# EAGLE board RN-52 Breakout-Panel-v10 (EAGLE 6.5.0), part 1 of 2
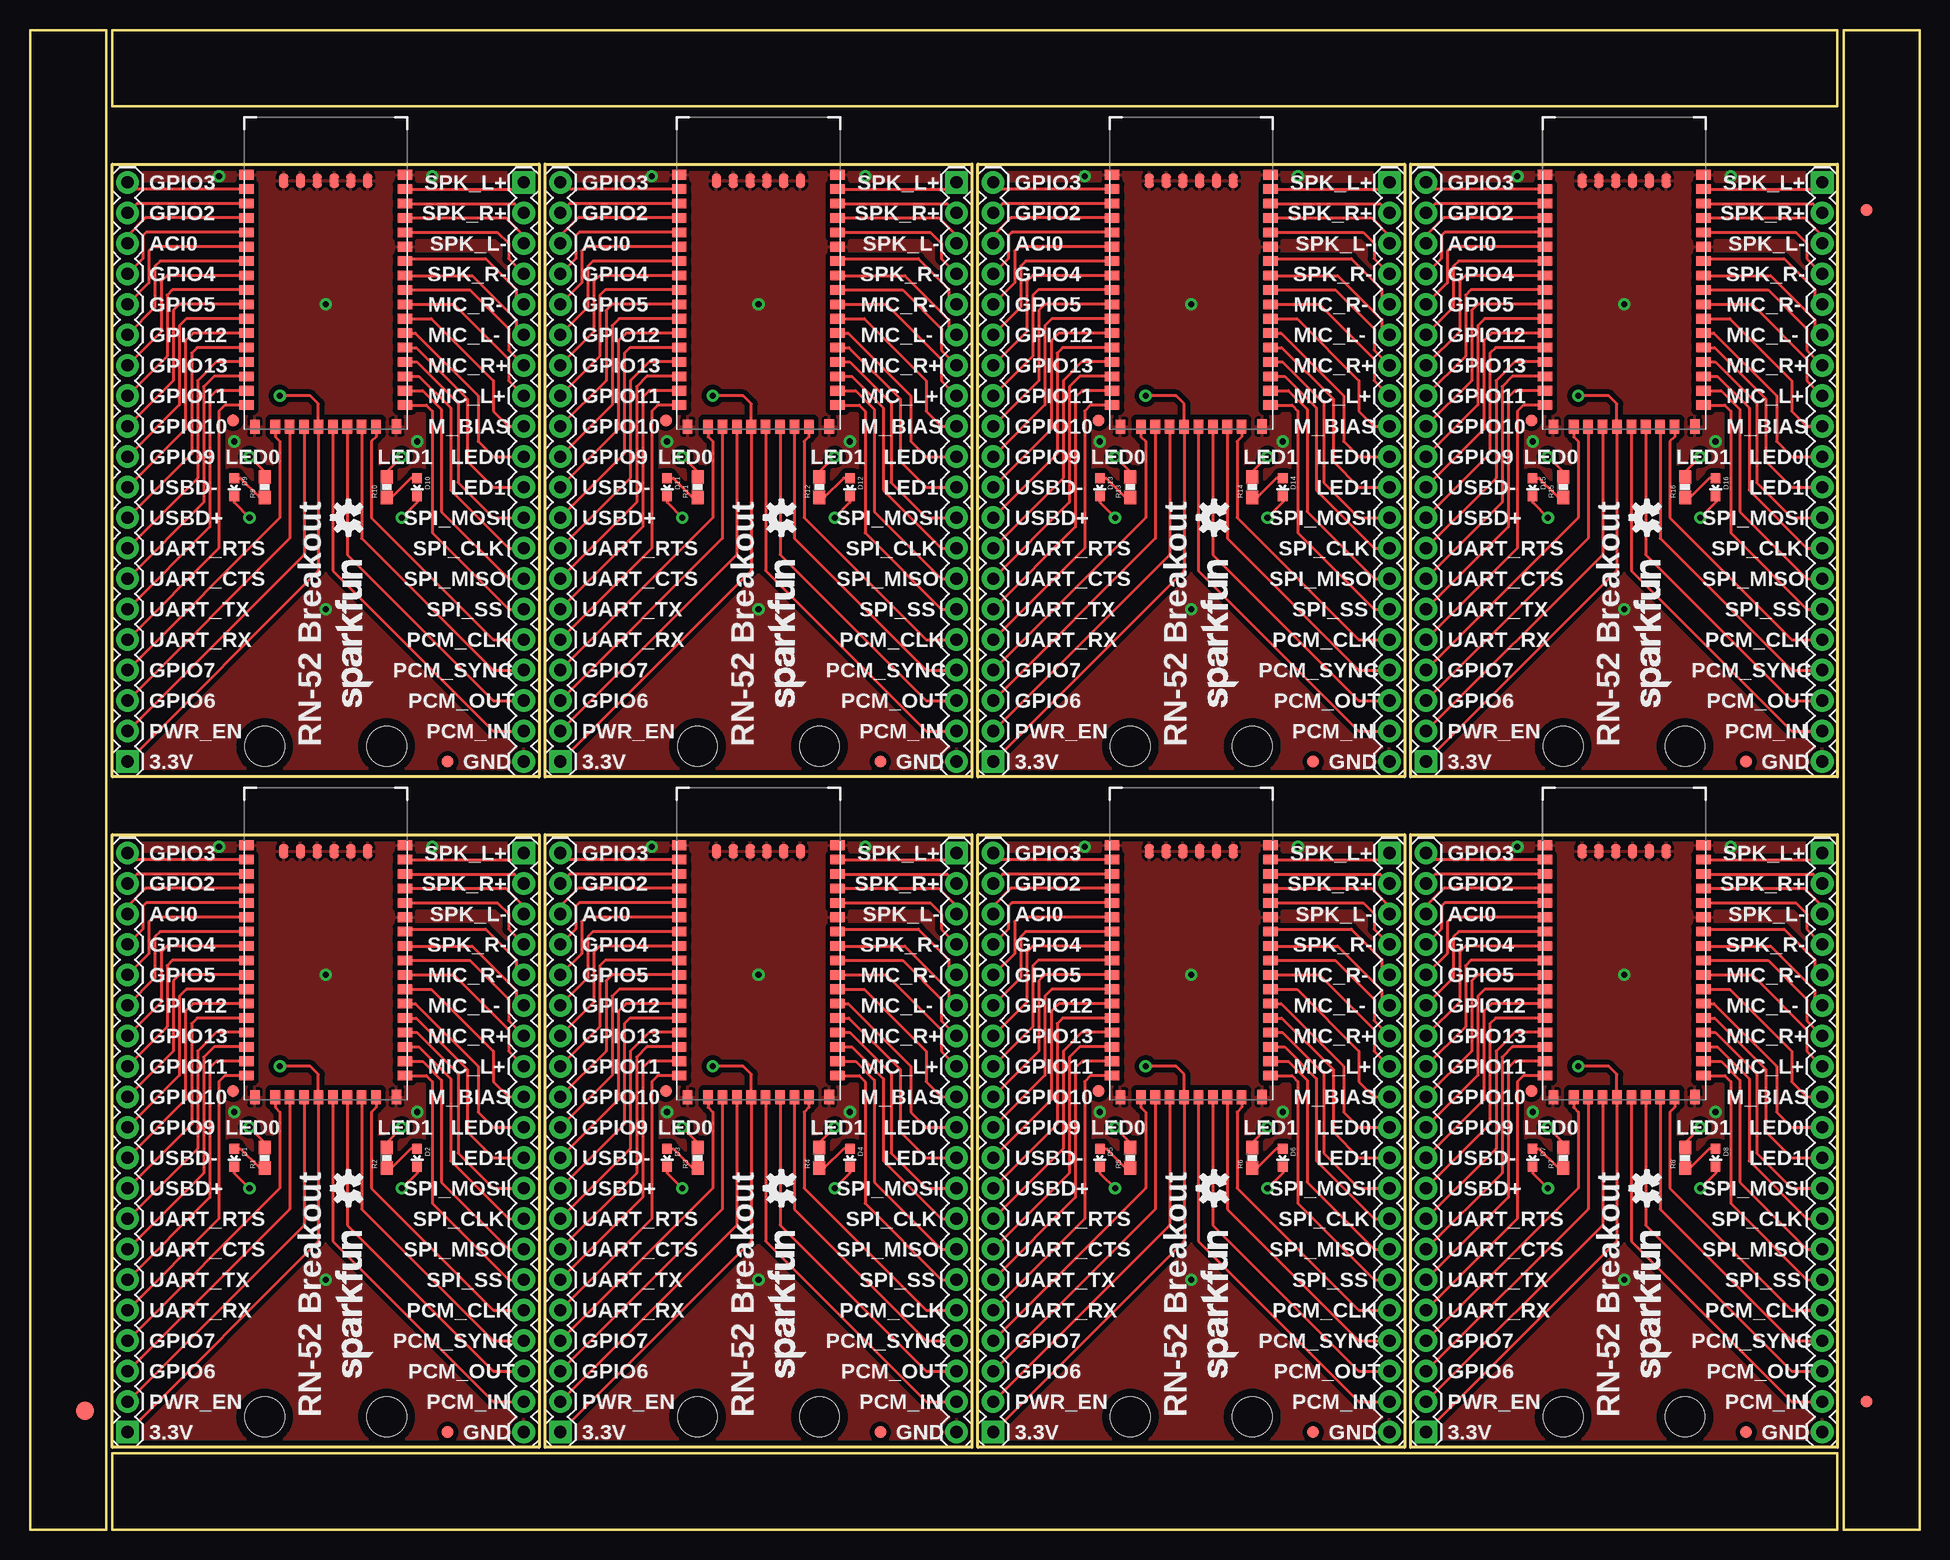
[diagram p0: board, top side]
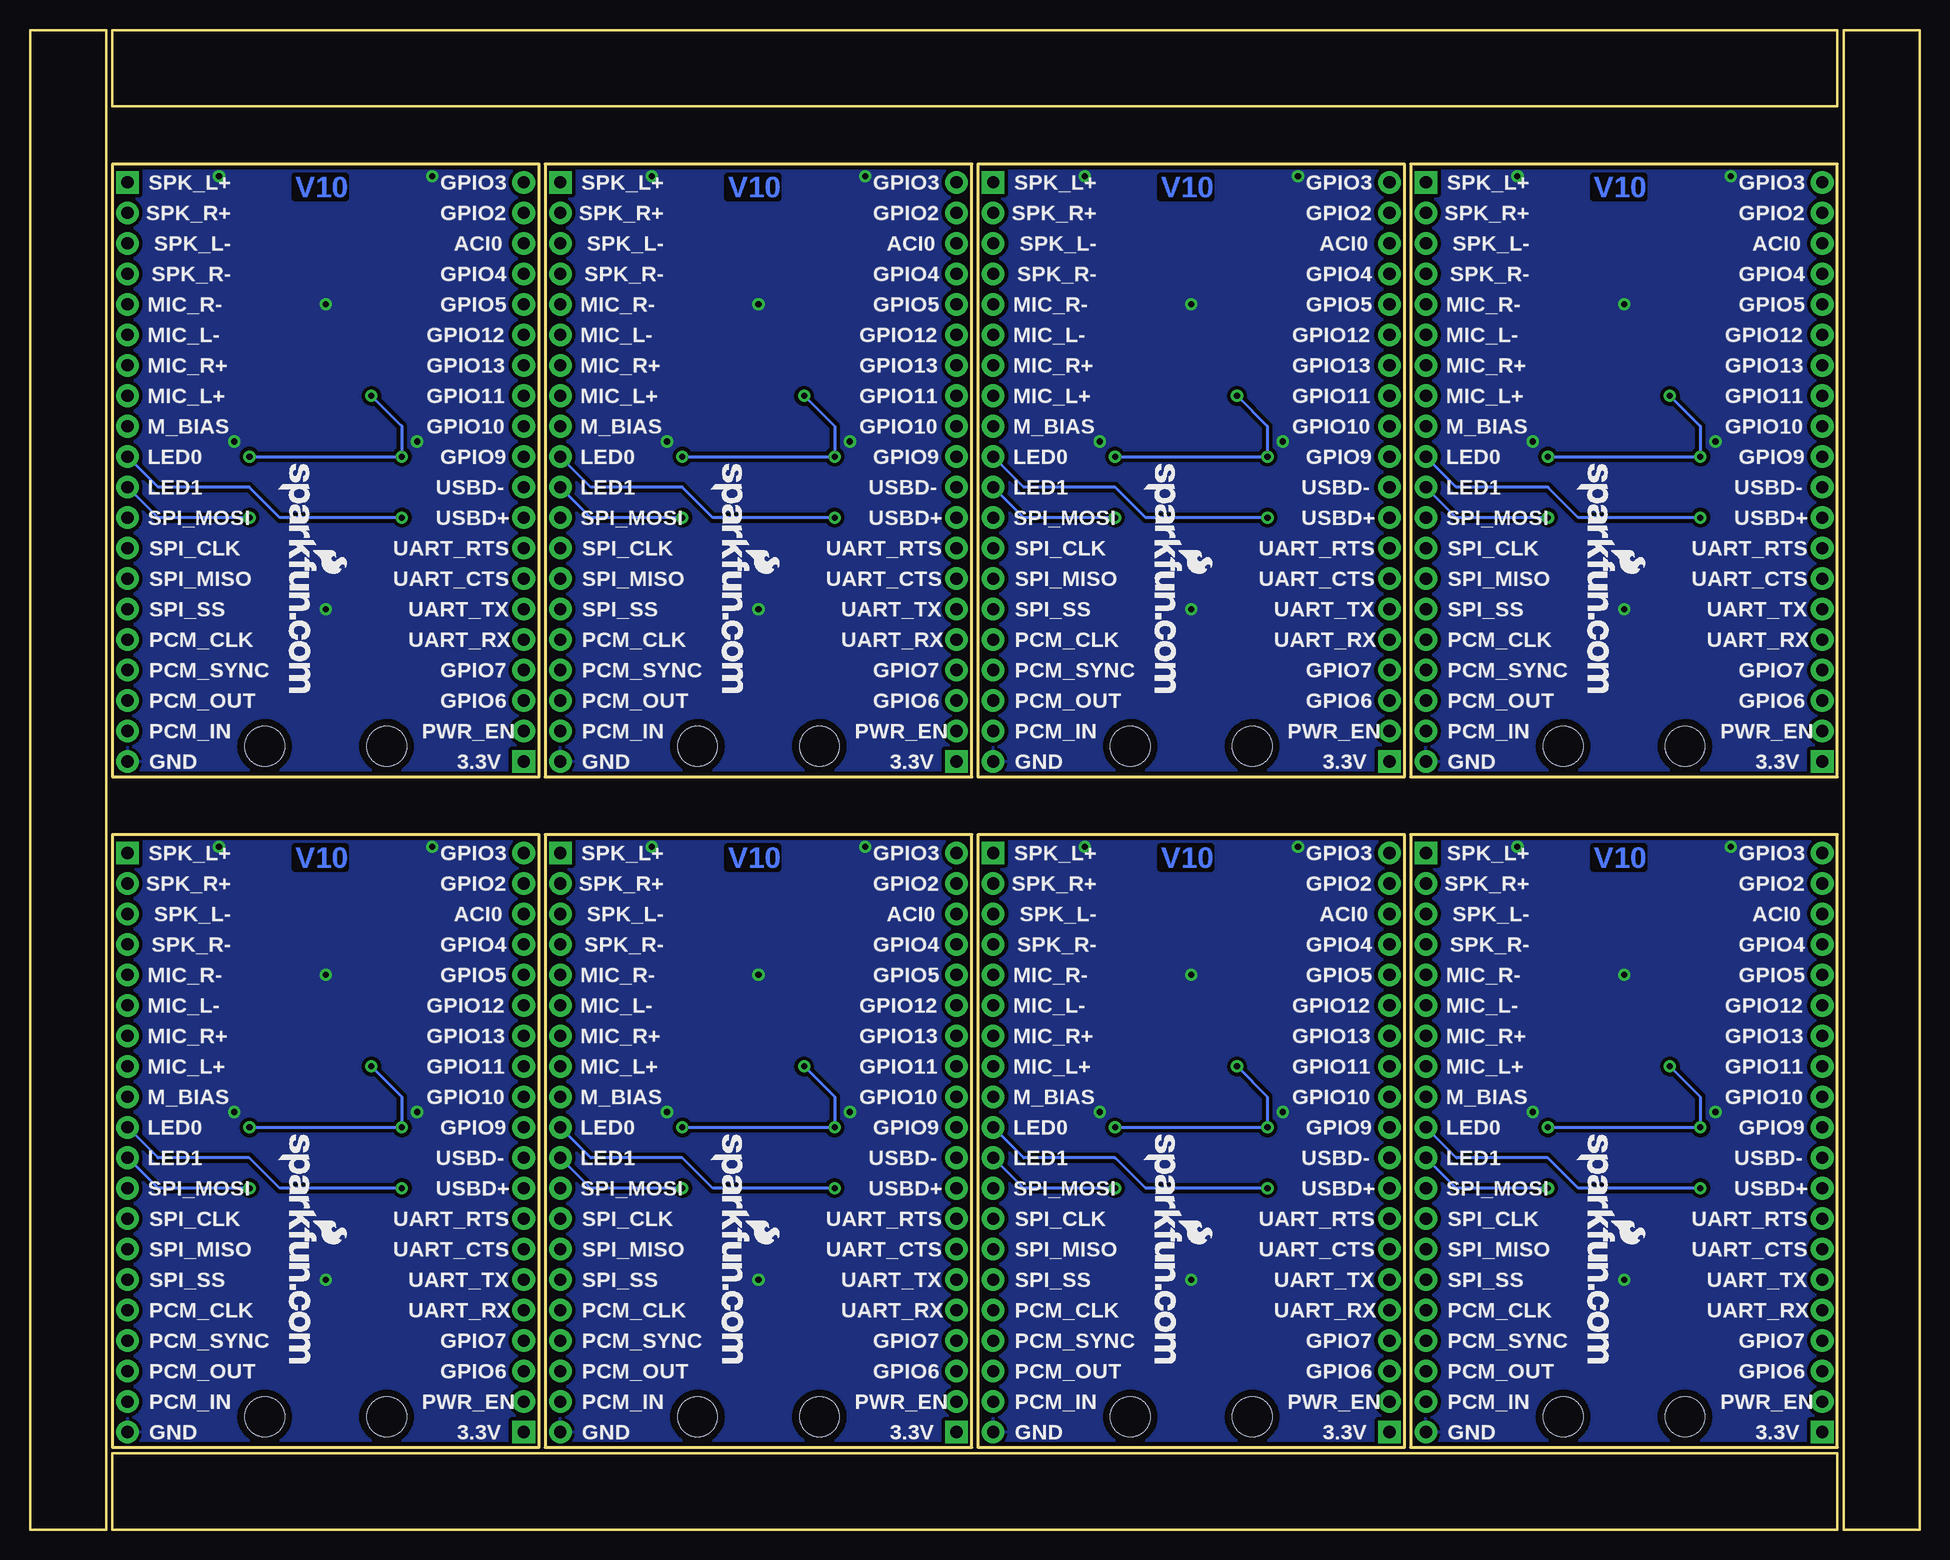
[diagram p1: board, bottom side, seen from below]

Size 157.48 x 124.97 mm. Coordinates in mm from the lower left corner, seen from the top.
Outline: 6.86,57.91 42.42,57.91 42.42,6.86 6.86,6.86 6.86,57.91
Outline: 42.93,57.91 78.49,57.91 78.49,6.86 42.93,6.86 42.93,57.91
Outline: 78.99,57.91 114.55,57.91 114.55,6.86 78.99,6.86 78.99,57.91
Outline: 115.06,57.91 150.62,57.91 150.62,6.86 115.06,6.86 115.06,57.91
Outline: 6.86,113.79 42.42,113.79 42.42,62.74 6.86,62.74 6.86,113.79
Outline: 42.93,113.79 78.49,113.79 78.49,62.74 42.93,62.74 42.93,113.79
Outline: 78.99,113.79 114.55,113.79 114.55,62.74 78.99,62.74 78.99,113.79
Outline: 115.06,113.79 150.62,113.79 150.62,62.74 115.06,62.74 115.06,113.79
Outline: 6.35,0 6.35,124.97 0,124.97 0,0 6.35,0
Outline: 6.86,6.35 6.86,0 150.62,0 150.62,6.35 6.86,6.35
Outline: 157.48,0 157.48,124.97 151.13,124.97 151.13,0 157.48,0
Outline: 150.62,118.62 150.62,124.97 6.86,124.97 6.86,118.62 150.62,118.62
Copper layers (1*16): Top 0.035mm / dielectric 1.5mm / Bottom 0.035mm
Design rules "default *": minimum track width 7mil, minimum drill 15mil, track to track 8mil, track to pad 8mil, pad to pad 8mil, via to via 8mil, smd to smd 8mil, copper to edge 8mil, drill to drill 8mil, minimum pad ring 12mil, minimum via ring 10mil, stop-mask expansion 4mil, vias tented up to drill 20mil, thermal gap 10mil

## Footprints (pad centres in the part's own frame; a part is rotated, then mirrored left to right if it is on the bottom)
LED-0603 = smd 0.8 x 0.8: A 0,-0.75; C 0,0.75
FIDUCIAL-1.5X3 = smd 1.5 x 1.5: 1 0,0
FIDUCIAL-1X2 = smd 1 x 1: 1 0,0
1X20 = drill 1.016 pad 1.88 square: 1 0,0 | drill 1.016 pad 1.88: 2 2.54,0; 3 5.08,0; 4 7.62,0; 5 10.16,0; 6 12.7,0; 7 15.24,0; 8 17.78,0; 9 20.32,0; 10 22.86,0; 11 25.4,0; 12 27.94,0; 13 30.48,0; 14 33.02,0; 15 35.56,0; 16 38.1,0; 17 40.64,0; 18 43.18,0; 19 45.72,0; 20 48.26,0
0603-RES = smd 1.1 x 1: 1 -0.85,0; 2 0.85,0
STAND-OFF = hole 3.302: 0,0
RN-52 = smd 1.2 x 0.8: 1 -6.6,8.33; 2 -6.6,7.13; 3 -6.6,5.93; 4 -6.6,4.73; 5 -6.6,3.53; 6 -6.6,2.33; 7 -6.6,1.13; 8 -6.6,-0.07; 9 -6.6,-1.27; 10 -6.6,-2.47; 11 -6.6,-3.67; 12 -6.6,-4.87; 13 -6.6,-6.07; 14 -6.6,-7.27; 15 -6.6,-8.47; 16 -6.6,-9.67; 25 6.6,-9.67; 26 6.6,-8.47; 27 6.6,-7.27; 28 6.6,-6.07; 29 6.6,-4.87; 30 6.6,-3.67; 31 6.6,-2.47; 32 6.6,-1.27; 33 6.6,-0.07; 34 6.6,1.13; 35 6.6,2.33; 36 6.6,3.53; 37 6.6,4.73; 38 6.6,5.93; 39 6.6,7.13; 40 6.6,8.33; G1 -6.6,9.53; G4 6.6,9.53 | smd 0.8 x 1.2: 17 -4.2,-11.47; 18 -3,-11.47; 19 -1.8,-11.47; 20 -0.6,-11.47; 21 0.6,-11.47; 22 1.8,-11.47; 23 3,-11.47; 24 4.2,-11.47; G2 -5.9,-11.47; G3 5.9,-11.46; RFG1 -3.5,9.03; RFG2 -2.1,9.03; RFG3 -0.7,9.03; RFG4 0.7,9.03; RFG5 2.1,9.03; RFG6 3.5,9.03

## Placement (x,y rotation side)
D1  GREEN  [LED-0603]  17.02,30.99 180 top
D2  RED  [LED-0603]  32.26,30.99 180 top
D3  GREEN  [LED-0603]  53.09,30.99 180 top
D4  RED  [LED-0603]  68.33,30.99 180 top
D5  GREEN  [LED-0603]  89.15,30.99 180 top
D6  RED  [LED-0603]  104.39,30.99 180 top
D7  GREEN  [LED-0603]  125.22,30.99 180 top
D8  RED  [LED-0603]  140.46,30.99 180 top
D9  GREEN  [LED-0603]  17.02,86.87 180 top
D10  RED  [LED-0603]  32.26,86.87 180 top
D11  GREEN  [LED-0603]  53.09,86.87 180 top
D12  RED  [LED-0603]  68.33,86.87 180 top
D13  GREEN  [LED-0603]  89.15,86.87 180 top
D14  RED  [LED-0603]  104.39,86.87 180 top
D15  GREEN  [LED-0603]  125.22,86.87 180 top
D16  RED  [LED-0603]  140.46,86.87 180 top
E$1  [FIDUCIAL-1.5X3]  4.57,9.91 0 top
E$4  [FIDUCIAL-1X2]  153.03,10.67 0 top
E$5  [FIDUCIAL-1X2]  153.03,109.98 180 top
FID1  FIDUCIAL1X2  [FIDUCIAL-1X2]  16.92,36.55 0 top
FID2  FIDUCIAL1X2  [FIDUCIAL-1X2]  34.8,8.13 0 top
FID3  FIDUCIAL1X2  [FIDUCIAL-1X2]  52.98,36.55 0 top
FID4  FIDUCIAL1X2  [FIDUCIAL-1X2]  70.87,8.13 0 top
FID5  FIDUCIAL1X2  [FIDUCIAL-1X2]  89.05,36.55 0 top
FID6  FIDUCIAL1X2  [FIDUCIAL-1X2]  106.93,8.13 0 top
FID7  FIDUCIAL1X2  [FIDUCIAL-1X2]  125.12,36.55 0 top
FID8  FIDUCIAL1X2  [FIDUCIAL-1X2]  143,8.13 0 top
FID9  FIDUCIAL1X2  [FIDUCIAL-1X2]  16.92,92.43 0 top
FID10  FIDUCIAL1X2  [FIDUCIAL-1X2]  34.8,64.01 0 top
FID11  FIDUCIAL1X2  [FIDUCIAL-1X2]  52.98,92.43 0 top
FID12  FIDUCIAL1X2  [FIDUCIAL-1X2]  70.87,64.01 0 top
FID13  FIDUCIAL1X2  [FIDUCIAL-1X2]  89.05,92.43 0 top
FID14  FIDUCIAL1X2  [FIDUCIAL-1X2]  106.93,64.01 0 top
FID15  FIDUCIAL1X2  [FIDUCIAL-1X2]  125.12,92.43 0 top
FID16  FIDUCIAL1X2  [FIDUCIAL-1X2]  143,64.01 0 top
JP1  M20  [1X20]  8.13,8.13 90 top
JP2  M20  [1X20]  41.15,56.39 270 top
JP3  M20  [1X20]  44.2,8.13 90 top
JP4  M20  [1X20]  77.22,56.39 270 top
JP5  M20  [1X20]  80.26,8.13 90 top
JP6  M20  [1X20]  113.28,56.39 270 top
JP7  M20  [1X20]  116.33,8.13 90 top
JP8  M20  [1X20]  149.35,56.39 270 top
JP9  M20  [1X20]  8.13,64.01 90 top
JP10  M20  [1X20]  41.15,112.27 270 top
JP11  M20  [1X20]  44.2,64.01 90 top
JP12  M20  [1X20]  77.22,112.27 270 top
JP13  M20  [1X20]  80.26,64.01 90 top
JP14  M20  [1X20]  113.28,112.27 270 top
JP15  M20  [1X20]  116.33,64.01 90 top
JP16  M20  [1X20]  149.35,112.27 270 top
LOGO1  OSHW-LOGOS  [OSHW-LOGO-S]  26.54,28.45 90 top
LOGO2  OSHW-LOGOS  [OSHW-LOGO-S]  62.61,28.45 90 top
LOGO3  LOGO-SFENEW  [SFE-NEW-WEBLOGO]  28.57,32.89 270 bottom
LOGO4  LOGO-SFENW2  [SFE-NEW-WEB]  28.57,12.7 90 top
LOGO5  LOGO-SFENEW  [SFE-NEW-WEBLOGO]  64.64,32.89 270 bottom
LOGO6  LOGO-SFENW2  [SFE-NEW-WEB]  64.64,12.7 90 top
LOGO7  OSHW-LOGOS  [OSHW-LOGO-S]  98.68,28.45 90 top
LOGO8  LOGO-SFENEW  [SFE-NEW-WEBLOGO]  100.71,32.89 270 bottom
LOGO9  LOGO-SFENW2  [SFE-NEW-WEB]  100.71,12.7 90 top
LOGO10  OSHW-LOGOS  [OSHW-LOGO-S]  134.75,28.45 90 top
LOGO11  LOGO-SFENEW  [SFE-NEW-WEBLOGO]  136.78,32.89 270 bottom
LOGO12  LOGO-SFENW2  [SFE-NEW-WEB]  136.78,12.7 90 top
LOGO13  OSHW-LOGOS  [OSHW-LOGO-S]  26.54,84.33 90 top
LOGO14  LOGO-SFENEW  [SFE-NEW-WEBLOGO]  28.57,88.77 270 bottom
LOGO15  LOGO-SFENW2  [SFE-NEW-WEB]  28.57,68.58 90 top
LOGO16  OSHW-LOGOS  [OSHW-LOGO-S]  62.61,84.33 90 top
LOGO17  LOGO-SFENEW  [SFE-NEW-WEBLOGO]  64.64,88.77 270 bottom
LOGO18  LOGO-SFENW2  [SFE-NEW-WEB]  64.64,68.58 90 top
LOGO19  OSHW-LOGOS  [OSHW-LOGO-S]  98.68,84.33 90 top
LOGO20  LOGO-SFENEW  [SFE-NEW-WEBLOGO]  100.71,88.77 270 bottom
LOGO21  LOGO-SFENW2  [SFE-NEW-WEB]  100.71,68.58 90 top
LOGO22  OSHW-LOGOS  [OSHW-LOGO-S]  134.75,84.33 90 top
LOGO23  LOGO-SFENEW  [SFE-NEW-WEBLOGO]  136.78,88.77 270 bottom
LOGO24  LOGO-SFENW2  [SFE-NEW-WEB]  136.78,68.58 90 top
R1  330  [0603-RES]  19.56,30.99 90 top
R2  330  [0603-RES]  29.72,30.99 90 top
R3  330  [0603-RES]  55.63,30.99 90 top
R4  330  [0603-RES]  65.79,30.99 90 top
R5  330  [0603-RES]  91.69,30.99 90 top
R6  330  [0603-RES]  101.85,30.99 90 top
R7  330  [0603-RES]  127.76,30.99 90 top
R8  330  [0603-RES]  137.92,30.99 90 top
R9  330  [0603-RES]  19.56,86.87 90 top
R10  330  [0603-RES]  29.72,86.87 90 top
R11  330  [0603-RES]  55.63,86.87 90 top
R12  330  [0603-RES]  65.79,86.87 90 top
R13  330  [0603-RES]  91.69,86.87 90 top
R14  330  [0603-RES]  101.85,86.87 90 top
R15  330  [0603-RES]  127.76,86.87 90 top
R16  330  [0603-RES]  137.92,86.87 90 top
STANDOFF1  STAND-OFF  [STAND-OFF]  19.56,9.4 0 top
STANDOFF2  STAND-OFF  [STAND-OFF]  29.72,9.4 0 top
STANDOFF3  STAND-OFF  [STAND-OFF]  55.63,9.4 0 top
STANDOFF4  STAND-OFF  [STAND-OFF]  65.79,9.4 0 top
STANDOFF5  STAND-OFF  [STAND-OFF]  91.69,9.4 0 top
STANDOFF6  STAND-OFF  [STAND-OFF]  101.85,9.4 0 top
STANDOFF7  STAND-OFF  [STAND-OFF]  127.76,9.4 0 top
STANDOFF8  STAND-OFF  [STAND-OFF]  137.92,9.4 0 top
STANDOFF9  STAND-OFF  [STAND-OFF]  19.56,65.28 0 top
STANDOFF10  STAND-OFF  [STAND-OFF]  29.72,65.28 0 top
STANDOFF11  STAND-OFF  [STAND-OFF]  55.63,65.28 0 top
STANDOFF12  STAND-OFF  [STAND-OFF]  65.79,65.28 0 top
STANDOFF13  STAND-OFF  [STAND-OFF]  91.69,65.28 0 top
STANDOFF14  STAND-OFF  [STAND-OFF]  101.85,65.28 0 top
STANDOFF15  STAND-OFF  [STAND-OFF]  127.76,65.28 0 top
STANDOFF16  STAND-OFF  [STAND-OFF]  137.92,65.28 0 top
U1  BLUETOOTH-RN-52  [RN-52]  24.64,47.5 0 top
U2  BLUETOOTH-RN-52  [RN-52]  60.71,47.5 0 top
U3  BLUETOOTH-RN-52  [RN-52]  96.77,47.5 0 top
U4  BLUETOOTH-RN-52  [RN-52]  132.84,47.5 0 top
U5  BLUETOOTH-RN-52  [RN-52]  24.64,103.38 0 top
U6  BLUETOOTH-RN-52  [RN-52]  60.71,103.38 0 top
U7  BLUETOOTH-RN-52  [RN-52]  96.77,103.38 0 top
U8  BLUETOOTH-RN-52  [RN-52]  132.84,103.38 0 top

## Library data of the parts
D1 D3 D5 D7 D9 D11 D13 D15 = SparkFun-LED; PROD_ID: DIO-00821
D2 D4 D6 D8 D10 D12 D14 D16 = SparkFun-LED; PROD_ID: DIO-00819
E$1 = SparkFun-Retired
E$4 E$5 FID1-FID16 LOGO1-LOGO24 = SparkFun-Aesthetics
JP1-JP16 = SparkFun-Connectors
R1-R16 = SparkFun-Resistors
STANDOFF1-STANDOFF16 = SparkFun-Electromechanical
U1-U8 = SparkFun-RF

## Nets
3.3V: JP1.1 R1.2 R2.2 U1.20
3.3V1: JP3.1 R3.2 R4.2 U2.20
3.3V2: JP5.1 R5.2 R6.2 U3.20
3.3V3: JP7.1 R7.2 R8.2 U4.20
3.3V4: JP9.1 R9.2 R10.2 U5.20
3.3V5: JP11.1 R11.2 R12.2 U6.20
3.3V6: JP13.1 R13.2 R14.2 U7.20
3.3V7: JP15.1 R15.2 R16.2 U8.20
AIC0: JP1.18 U1.3
AIC1: JP3.18 U2.3
AIC2: JP5.18 U3.3
AIC3: JP7.18 U4.3
AIC4: JP9.18 U5.3
AIC5: JP11.18 U6.3
AIC6: JP13.18 U7.3
AIC7: JP15.18 U8.3
GND: JP2.20 U1.36 U1.G1 U1.G2 U1.G3 U1.G4 U1.RFG1 U1.RFG2 U1.RFG3 U1.RFG4 U1.RFG5 U1.RFG6
GND1: JP4.20 U2.36 U2.G1 U2.G2 U2.G3 U2.G4 U2.RFG1 U2.RFG2 U2.RFG3 U2.RFG4 U2.RFG5 U2.RFG6
GND2: JP6.20 U3.36 U3.G1 U3.G2 U3.G3 U3.G4 U3.RFG1 U3.RFG2 U3.RFG3 U3.RFG4 U3.RFG5 U3.RFG6
GND3: JP8.20 U4.36 U4.G1 U4.G2 U4.G3 U4.G4 U4.RFG1 U4.RFG2 U4.RFG3 U4.RFG4 U4.RFG5 U4.RFG6
GND4: JP10.20 U5.36 U5.G1 U5.G2 U5.G3 U5.G4 U5.RFG1 U5.RFG2 U5.RFG3 U5.RFG4 U5.RFG5 U5.RFG6
GND5: JP12.20 U6.36 U6.G1 U6.G2 U6.G3 U6.G4 U6.RFG1 U6.RFG2 U6.RFG3 U6.RFG4 U6.RFG5 U6.RFG6
GND6: JP14.20 U7.36 U7.G1 U7.G2 U7.G3 U7.G4 U7.RFG1 U7.RFG2 U7.RFG3 U7.RFG4 U7.RFG5 U7.RFG6
GND7: JP16.20 U8.36 U8.G1 U8.G2 U8.G3 U8.G4 U8.RFG1 U8.RFG2 U8.RFG3 U8.RFG4 U8.RFG5 U8.RFG6
GPIO1: JP3.20 U2.1
GPIO2: JP1.19 U1.2
GPIO3: JP1.20 U1.1
GPIO4: JP1.17 U1.4
GPIO5: JP1.16 U1.5
GPIO6: JP1.3 U1.18
GPIO7: JP1.4 U1.17
GPIO8: JP3.19 U2.2
GPIO9: JP1.11 U1.10
GPIO10: JP1.12 U1.9
GPIO11: JP1.13 U1.8
GPIO12: JP1.15 U1.6
GPIO13: JP1.14 U1.7
GPIO14: JP3.17 U2.4
GPIO15: JP3.16 U2.5
GPIO16: JP3.15 U2.6
GPIO17: JP3.14 U2.7
GPIO18: JP3.13 U2.8
GPIO19: JP3.12 U2.9
GPIO20: JP3.11 U2.10
GPIO21: JP3.4 U2.17
GPIO22: JP3.3 U2.18
GPIO23: JP5.20 U3.1
GPIO24: JP5.19 U3.2
GPIO25: JP5.17 U3.4
GPIO26: JP5.16 U3.5
GPIO27: JP5.15 U3.6
GPIO28: JP5.14 U3.7
GPIO29: JP5.13 U3.8
GPIO30: JP5.12 U3.9
GPIO31: JP5.11 U3.10
GPIO32: JP5.4 U3.17
GPIO33: JP5.3 U3.18
GPIO34: JP7.20 U4.1
GPIO35: JP7.19 U4.2
GPIO36: JP7.17 U4.4
GPIO37: JP7.16 U4.5
GPIO38: JP7.15 U4.6
GPIO39: JP7.14 U4.7
GPIO40: JP7.13 U4.8
GPIO41: JP7.12 U4.9
GPIO42: JP7.11 U4.10
GPIO43: JP7.4 U4.17
GPIO44: JP7.3 U4.18
GPIO45: JP9.20 U5.1
GPIO46: JP9.19 U5.2
GPIO47: JP9.17 U5.4
GPIO48: JP9.16 U5.5
GPIO49: JP9.15 U5.6
GPIO50: JP9.14 U5.7
GPIO51: JP9.13 U5.8
GPIO52: JP9.12 U5.9
GPIO53: JP9.11 U5.10
GPIO54: JP9.4 U5.17
GPIO55: JP9.3 U5.18
GPIO56: JP11.20 U6.1
GPIO57: JP11.19 U6.2
GPIO58: JP11.17 U6.4
GPIO59: JP11.16 U6.5
GPIO60: JP11.15 U6.6
GPIO61: JP11.14 U6.7
GPIO62: JP11.13 U6.8
GPIO63: JP11.12 U6.9
GPIO64: JP11.11 U6.10
GPIO65: JP11.4 U6.17
GPIO66: JP11.3 U6.18
GPIO67: JP13.20 U7.1
GPIO68: JP13.19 U7.2
GPIO69: JP13.17 U7.4
GPIO70: JP13.16 U7.5
GPIO71: JP13.15 U7.6
GPIO72: JP13.14 U7.7
GPIO73: JP13.13 U7.8
GPIO74: JP13.12 U7.9
GPIO75: JP13.11 U7.10
GPIO76: JP13.4 U7.17
GPIO77: JP13.3 U7.18
GPIO78: JP15.20 U8.1
GPIO79: JP15.19 U8.2
GPIO80: JP15.17 U8.4
GPIO81: JP15.16 U8.5
GPIO82: JP15.15 U8.6
GPIO83: JP15.14 U8.7
GPIO84: JP15.13 U8.8
GPIO85: JP15.12 U8.9
GPIO86: JP15.11 U8.10
GPIO87: JP15.4 U8.17
GPIO88: JP15.3 U8.18
LED0: D1.C JP2.10 U1.30
LED1: D2.C JP2.11 U1.29
LED2: D3.C JP4.10 U2.30
LED3: D4.C JP4.11 U2.29
LED4: D5.C JP6.10 U3.30
LED5: D6.C JP6.11 U3.29
LED6: D7.C JP8.10 U4.30
LED7: D8.C JP8.11 U4.29
LED8: D9.C JP10.10 U5.30
LED9: D10.C JP10.11 U5.29
LED10: D11.C JP12.10 U6.30
LED11: D12.C JP12.11 U6.29
LED12: D13.C JP14.10 U7.30
LED13: D14.C JP14.11 U7.29
LED14: D15.C JP16.10 U8.30
LED15: D16.C JP16.11 U8.29
MIC_BIAS: JP2.9 U1.31
MIC_BIAS1: JP4.9 U2.31
MIC_BIAS2: JP6.9 U3.31
MIC_BIAS3: JP8.9 U4.31
MIC_BIAS4: JP10.9 U5.31
MIC_BIAS5: JP12.9 U6.31
MIC_BIAS6: JP14.9 U7.31
MIC_BIAS7: JP16.9 U8.31
MIC_L+: JP2.8 U1.32
MIC_L+1: JP4.8 U2.32
MIC_L+2: JP6.8 U3.32
MIC_L+3: JP8.8 U4.32
MIC_L+4: JP10.8 U5.32
MIC_L+5: JP12.8 U6.32
MIC_L+6: JP14.8 U7.32
MIC_L+7: JP16.8 U8.32
MIC_L-: JP2.6 U1.34
MIC_L-1: JP4.6 U2.34
MIC_L-2: JP6.6 U3.34
MIC_L-3: JP8.6 U4.34
MIC_L-4: JP10.6 U5.34
MIC_L-5: JP12.6 U6.34
MIC_L-6: JP14.6 U7.34
MIC_L-7: JP16.6 U8.34
MIC_R+: JP2.7 U1.33
MIC_R+1: JP4.7 U2.33
MIC_R+2: JP6.7 U3.33
MIC_R+3: JP8.7 U4.33
MIC_R+4: JP10.7 U5.33
MIC_R+5: JP12.7 U6.33
MIC_R+6: JP14.7 U7.33
MIC_R+7: JP16.7 U8.33
MIC_R-: JP2.5 U1.35
MIC_R-1: JP4.5 U2.35
MIC_R-2: JP6.5 U3.35
MIC_R-3: JP8.5 U4.35
MIC_R-4: JP10.5 U5.35
MIC_R-5: JP12.5 U6.35
MIC_R-6: JP14.5 U7.35
MIC_R-7: JP16.5 U8.35
N$1: D2.A R2.1
N$2: D1.A R1.1
N$3: D4.A R4.1
N$4: D3.A R3.1
N$5: D6.A R6.1
N$6: D5.A R5.1
N$7: D8.A R8.1
N$8: D7.A R7.1
N$9: D10.A R10.1
N$10: D9.A R9.1
N$11: D12.A R12.1
N$12: D11.A R11.1
N$13: D14.A R14.1
N$14: D13.A R13.1
N$15: D16.A R16.1
N$16: D15.A R15.1
PCM_CLK: JP2.16 U1.24
PCM_CLK1: JP4.16 U2.24
PCM_CLK2: JP6.16 U3.24
PCM_CLK3: JP8.16 U4.24
PCM_CLK4: JP10.16 U5.24
PCM_CLK5: JP12.16 U6.24
PCM_CLK6: JP14.16 U7.24
PCM_CLK7: JP16.16 U8.24
PCM_IN: JP2.19 U1.21
PCM_IN1: JP4.19 U2.21
PCM_IN2: JP6.19 U3.21
PCM_IN3: JP8.19 U4.21
PCM_IN4: JP10.19 U5.21
PCM_IN5: JP12.19 U6.21
PCM_IN6: JP14.19 U7.21
PCM_IN7: JP16.19 U8.21
PCM_OUT: JP2.18 U1.22
PCM_OUT1: JP4.18 U2.22
PCM_OUT2: JP6.18 U3.22
PCM_OUT3: JP8.18 U4.22
PCM_OUT4: JP10.18 U5.22
PCM_OUT5: JP12.18 U6.22
PCM_OUT6: JP14.18 U7.22
PCM_OUT7: JP16.18 U8.22
PCM_SYNC: JP2.17 U1.23
PCM_SYNC1: JP4.17 U2.23
PCM_SYNC2: JP6.17 U3.23
PCM_SYNC3: JP8.17 U4.23
PCM_SYNC4: JP10.17 U5.23
PCM_SYNC5: JP12.17 U6.23
PCM_SYNC6: JP14.17 U7.23
PCM_SYNC7: JP16.17 U8.23
PWREN: JP1.2 U1.19
PWREN1: JP3.2 U2.19
PWREN2: JP5.2 U3.19
PWREN3: JP7.2 U4.19
PWREN4: JP9.2 U5.19
PWREN5: JP11.2 U6.19
PWREN6: JP13.2 U7.19
PWREN7: JP15.2 U8.19
SPI_CLK: JP2.13 U1.27
SPI_CLK1: JP4.13 U2.27
SPI_CLK2: JP6.13 U3.27
SPI_CLK3: JP8.13 U4.27
SPI_CLK4: JP10.13 U5.27
SPI_CLK5: JP12.13 U6.27
SPI_CLK6: JP14.13 U7.27
SPI_CLK7: JP16.13 U8.27
SPI_MISO: JP2.14 U1.26
SPI_MISO1: JP4.14 U2.26
SPI_MISO2: JP6.14 U3.26
SPI_MISO3: JP8.14 U4.26
SPI_MISO4: JP10.14 U5.26
SPI_MISO5: JP12.14 U6.26
SPI_MISO6: JP14.14 U7.26
SPI_MISO7: JP16.14 U8.26
SPI_MOSI: JP2.12 U1.28
SPI_MOSI1: JP4.12 U2.28
SPI_MOSI2: JP6.12 U3.28
SPI_MOSI3: JP8.12 U4.28
SPI_MOSI4: JP10.12 U5.28
SPI_MOSI5: JP12.12 U6.28
SPI_MOSI6: JP14.12 U7.28
SPI_MOSI7: JP16.12 U8.28
SPI_SS: JP2.15 U1.25
SPI_SS1: JP4.15 U2.25
SPI_SS2: JP6.15 U3.25
SPI_SS3: JP8.15 U4.25
SPI_SS4: JP10.15 U5.25
SPI_SS5: JP12.15 U6.25
SPI_SS6: JP14.15 U7.25
SPI_SS7: JP16.15 U8.25
SPKR_L+: JP2.1 U1.40
SPKR_L+1: JP4.1 U2.40
SPKR_L+2: JP6.1 U3.40
SPKR_L+3: JP8.1 U4.40
SPKR_L+4: JP10.1 U5.40
SPKR_L+5: JP12.1 U6.40
SPKR_L+6: JP14.1 U7.40
SPKR_L+7: JP16.1 U8.40
SPKR_L-: JP2.3 U1.38
SPKR_L-1: JP4.3 U2.38
SPKR_L-2: JP6.3 U3.38
SPKR_L-3: JP8.3 U4.38
SPKR_L-4: JP10.3 U5.38
SPKR_L-5: JP12.3 U6.38
SPKR_L-6: JP14.3 U7.38
SPKR_L-7: JP16.3 U8.38
SPKR_R+: JP2.2 U1.39
SPKR_R+1: JP4.2 U2.39
SPKR_R+2: JP6.2 U3.39
SPKR_R+3: JP8.2 U4.39
SPKR_R+4: JP10.2 U5.39
SPKR_R+5: JP12.2 U6.39
SPKR_R+6: JP14.2 U7.39
SPKR_R+7: JP16.2 U8.39
SPKR_R-: JP2.4 U1.37
SPKR_R-1: JP4.4 U2.37
SPKR_R-2: JP6.4 U3.37
SPKR_R-3: JP8.4 U4.37
SPKR_R-4: JP10.4 U5.37
SPKR_R-5: JP12.4 U6.37
SPKR_R-6: JP14.4 U7.37
SPKR_R-7: JP16.4 U8.37
UART_CTS: JP1.7 U1.14
UART_CTS1: JP3.7 U2.14
UART_CTS2: JP5.7 U3.14
UART_CTS3: JP7.7 U4.14
UART_CTS4: JP9.7 U5.14
UART_CTS5: JP11.7 U6.14
UART_CTS6: JP13.7 U7.14
UART_CTS7: JP15.7 U8.14
UART_RTS: JP1.8 U1.13
UART_RTS1: JP3.8 U2.13
UART_RTS2: JP5.8 U3.13
UART_RTS3: JP7.8 U4.13
UART_RTS4: JP9.8 U5.13
UART_RTS5: JP11.8 U6.13
UART_RTS6: JP13.8 U7.13
UART_RTS7: JP15.8 U8.13
UART_RX: JP1.5 U1.16
UART_RX1: JP3.5 U2.16
UART_RX2: JP5.5 U3.16
UART_RX3: JP7.5 U4.16
UART_RX4: JP9.5 U5.16
UART_RX5: JP11.5 U6.16
UART_RX6: JP13.5 U7.16
UART_RX7: JP15.5 U8.16
UART_TX: JP1.6 U1.15
UART_TX1: JP3.6 U2.15
UART_TX2: JP5.6 U3.15
UART_TX3: JP7.6 U4.15
UART_TX4: JP9.6 U5.15
UART_TX5: JP11.6 U6.15
UART_TX6: JP13.6 U7.15
UART_TX7: JP15.6 U8.15
USBD+: JP1.9 U1.12
USBD+1: JP3.9 U2.12
USBD+2: JP5.9 U3.12
USBD+3: JP7.9 U4.12
USBD+4: JP9.9 U5.12
USBD+5: JP11.9 U6.12
USBD+6: JP13.9 U7.12
USBD+7: JP15.9 U8.12
USBD-: JP1.10 U1.11
USBD-1: JP3.10 U2.11
USBD-2: JP5.10 U3.11
USBD-3: JP7.10 U4.11
USBD-4: JP9.10 U5.11
USBD-5: JP11.10 U6.11
USBD-6: JP13.10 U7.11
USBD-7: JP15.10 U8.11

## Tracks (layer width: path | path; a pad name or v marks a point on that pad's centre or on a via)
3.3V  (via drill 0.51)
  Top 0.254: JP1.1 24.04,24.04 U1.20 24.04,37.94 23.37,38.61 v20.83,38.61 | R2.2 29.72,32.26 v30.99,33.53 | R1.2 19.56,32.26 v18.29,33.53
  Bottom 0.254: v30.99,33.53 v18.29,33.53 18.29,36.07 v20.83,38.61
3.3V1  (via drill 0.51)
  Top 0.254: JP3.1 60.11,24.04 U2.20 60.11,37.94 59.44,38.61 v56.9,38.61 | R4.2 65.79,32.26 v67.06,33.53 | R3.2 55.63,32.26 v54.36,33.53
  Bottom 0.254: v67.06,33.53 v54.36,33.53 54.36,36.07 v56.9,38.61
3.3V2  (via drill 0.51)
  Top 0.254: JP5.1 96.17,24.04 U3.20 96.17,37.94 95.5,38.61 v92.96,38.61 | R6.2 101.85,32.26 v103.12,33.53 | R5.2 91.69,32.26 v90.42,33.53
  Bottom 0.254: v103.12,33.53 v90.42,33.53 90.42,36.07 v92.96,38.61
3.3V3  (via drill 0.51)
  Top 0.254: JP7.1 132.24,24.04 U4.20 132.24,37.94 131.57,38.61 v129.03,38.61 | R8.2 137.92,32.26 v139.19,33.53 | R7.2 127.76,32.26 v126.49,33.53
  Bottom 0.254: v139.19,33.53 v126.49,33.53 126.49,36.07 v129.03,38.61
3.3V4  (via drill 0.51)
  Top 0.254: JP9.1 24.04,79.92 U5.20 24.04,93.82 23.37,94.49 v20.83,94.49 | R10.2 29.72,88.14 v30.99,89.41 | R9.2 19.56,88.14 v18.29,89.41
  Bottom 0.254: v30.99,89.41 v18.29,89.41 18.29,91.95 v20.83,94.49
3.3V5  (via drill 0.51)
  Top 0.254: JP11.1 60.11,79.92 U6.20 60.11,93.82 59.44,94.49 v56.9,94.49 | R12.2 65.79,88.14 v67.06,89.41 | R11.2 55.63,88.14 v54.36,89.41
  Bottom 0.254: v67.06,89.41 v54.36,89.41 54.36,91.95 v56.9,94.49
3.3V6  (via drill 0.51)
  Top 0.254: JP13.1 96.17,79.92 U7.20 96.17,93.82 95.5,94.49 v92.96,94.49 | R14.2 101.85,88.14 v103.12,89.41 | R13.2 91.69,88.14 v90.42,89.41
  Bottom 0.254: v103.12,89.41 v90.42,89.41 90.42,91.95 v92.96,94.49
3.3V7  (via drill 0.51)
  Top 0.254: JP15.1 132.24,79.92 U8.20 132.24,93.82 131.57,94.49 v129.03,94.49 | R16.2 137.92,88.14 v139.19,89.41 | R15.2 127.76,88.14 v126.49,89.41
  Bottom 0.254: v139.19,89.41 v126.49,89.41 126.49,91.95 v129.03,94.49
AIC0
  Top 0.254: U1.3 9.61,53.43 8.13,51.94 JP1.18
AIC1
  Top 0.254: U2.3 45.68,53.43 44.2,51.94 JP3.18
AIC2
  Top 0.254: U3.3 81.75,53.43 80.26,51.94 JP5.18
AIC3
  Top 0.254: U4.3 117.82,53.43 116.33,51.94 JP7.18
AIC4
  Top 0.254: U5.3 9.61,109.31 8.13,107.82 JP9.18
AIC5
  Top 0.254: U6.3 45.68,109.31 44.2,107.82 JP11.18
AIC6
  Top 0.254: U7.3 81.75,109.31 80.26,107.82 JP13.18
AIC7
  Top 0.254: U8.3 117.82,109.31 116.33,107.82 JP15.18
GND  (via drill 0.51)
  other vias: 24.64,46.23 24.64,20.83 17.02,34.8 32.26,34.8 33.53,56.9 15.75,56.9
  pour Bottom (isolate 0.305): 6.86,57.66 42.42,57.66 42.42,6.86 6.86,6.86
  pour Top (isolate 0.406): 6.86,57.66 42.42,57.66 42.42,6.86 6.86,6.86
GND1  (via drill 0.51)
  other vias: 60.71,46.23 60.71,20.83 53.09,34.8 68.33,34.8 69.6,56.9 51.82,56.9
  pour Bottom (isolate 0.305): 42.93,57.66 78.49,57.66 78.49,6.86 42.93,6.86
  pour Top (isolate 0.406): 42.93,57.66 78.49,57.66 78.49,6.86 42.93,6.86
GND2  (via drill 0.51)
  other vias: 96.77,46.23 96.77,20.83 89.15,34.8 104.39,34.8 105.66,56.9 87.88,56.9
  pour Bottom (isolate 0.305): 78.99,57.66 114.55,57.66 114.55,6.86 78.99,6.86
  pour Top (isolate 0.406): 78.99,57.66 114.55,57.66 114.55,6.86 78.99,6.86
GND3  (via drill 0.51)
  other vias: 132.84,46.23 132.84,20.83 125.22,34.8 140.46,34.8 141.73,56.9 123.95,56.9
  pour Bottom (isolate 0.305): 115.06,57.66 150.62,57.66 150.62,6.86 115.06,6.86
  pour Top (isolate 0.406): 115.06,57.66 150.62,57.66 150.62,6.86 115.06,6.86
GND4  (via drill 0.51)
  other vias: 24.64,102.11 24.64,76.71 17.02,90.68 32.26,90.68 33.53,112.78 15.75,112.78
  pour Bottom (isolate 0.305): 6.86,113.54 42.42,113.54 42.42,62.74 6.86,62.74
  pour Top (isolate 0.406): 6.86,113.54 42.42,113.54 42.42,62.74 6.86,62.74
GND5  (via drill 0.51)
  other vias: 60.71,102.11 60.71,76.71 53.09,90.68 68.33,90.68 69.6,112.78 51.82,112.78
  pour Bottom (isolate 0.305): 42.93,113.54 78.49,113.54 78.49,62.74 42.93,62.74
  pour Top (isolate 0.406): 42.93,113.54 78.49,113.54 78.49,62.74 42.93,62.74
GND6  (via drill 0.51)
  other vias: 96.77,102.11 96.77,76.71 89.15,90.68 104.39,90.68 105.66,112.78 87.88,112.78
  pour Bottom (isolate 0.305): 78.99,113.54 114.55,113.54 114.55,62.74 78.99,62.74
  pour Top (isolate 0.406): 78.99,113.54 114.55,113.54 114.55,62.74 78.99,62.74
GND7  (via drill 0.51)
  other vias: 132.84,102.11 132.84,76.71 125.22,90.68 140.46,90.68 141.73,112.78 123.95,112.78
  pour Bottom (isolate 0.305): 115.06,113.54 150.62,113.54 150.62,62.74 115.06,62.74
  pour Top (isolate 0.406): 115.06,113.54 150.62,113.54 150.62,62.74 115.06,62.74
GPIO1
  Top 0.254: U2.1 44.76,55.83 JP3.20
GPIO2
  Top 0.254: U1.2 8.91,54.63 JP1.19
GPIO3
  Top 0.254: U1.1 8.69,55.83 JP1.20
GPIO4
  Top 0.254: U1.4 9.68,52.23 9.4,51.94 9.4,50.04 JP1.17
GPIO5
  Top 0.254: U1.5 10.26,51.03 9.91,50.67 9.91,48.01 JP1.16
GPIO6
  Top 0.254: U1.18 21.64,26.72 JP1.3
GPIO7
  Top 0.254: U1.17 20.44,35.19 20.83,34.8 20.83,28.45 JP1.4
GPIO8
  Top 0.254: U2.2 44.98,54.63 JP3.19
GPIO9
  Top 0.254: U1.10 13.02,45.03 12.45,44.45 12.45,37.85 JP1.11
GPIO10
  Top 0.254: U1.9 12.45,46.23 11.94,45.72 11.94,39.88 JP1.12
GPIO11
  Top 0.254: U1.8 11.87,47.43 11.43,46.99 11.43,41.91 JP1.13
GPIO12
  Top 0.254: U1.6 10.84,49.83 10.41,49.4 10.41,45.97 JP1.15
GPIO13
  Top 0.254: U1.7 11.42,48.63 10.92,48.13 10.92,43.94 JP1.14
GPIO14
  Top 0.254: U2.4 45.75,52.23 45.47,51.94 45.47,50.04 JP3.17
GPIO15
  Top 0.254: U2.5 46.33,51.03 45.97,50.67 45.97,48.01 JP3.16
GPIO16
  Top 0.254: U2.6 46.91,49.83 46.48,49.4 46.48,45.97 JP3.15
GPIO17
  Top 0.254: U2.7 47.48,48.63 46.99,48.13 46.99,43.94 JP3.14
GPIO18
  Top 0.254: U2.8 47.94,47.43 47.5,46.99 47.5,41.91 JP3.13
GPIO19
  Top 0.254: U2.9 48.51,46.23 48.01,45.72 48.01,39.88 JP3.12
GPIO20
  Top 0.254: U2.10 49.09,45.03 48.51,44.45 48.51,37.85 JP3.11
GPIO21
  Top 0.254: U2.17 56.51,35.19 56.9,34.8 56.9,28.45 JP3.4
GPIO22
  Top 0.254: U2.18 57.71,26.72 JP3.3
GPIO23
  Top 0.254: U3.1 80.82,55.83 JP5.20
GPIO24
  Top 0.254: U3.2 81.04,54.63 JP5.19
GPIO25
  Top 0.254: U3.4 81.82,52.23 81.53,51.94 81.53,50.04 JP5.17
GPIO26
  Top 0.254: U3.5 82.4,51.03 82.04,50.67 82.04,48.01 JP5.16
GPIO27
  Top 0.254: U3.6 82.97,49.83 82.55,49.4 82.55,45.97 JP5.15
GPIO28
  Top 0.254: U3.7 83.55,48.63 83.06,48.13 83.06,43.94 JP5.14
GPIO29
  Top 0.254: U3.8 84,47.43 83.57,46.99 83.57,41.91 JP5.13
GPIO30
  Top 0.254: U3.9 84.58,46.23 84.07,45.72 84.07,39.88 JP5.12
GPIO31
  Top 0.254: U3.10 85.16,45.03 84.58,44.45 84.58,37.85 JP5.11
GPIO32
  Top 0.254: U3.17 92.57,35.19 92.96,34.8 92.96,28.45 JP5.4
GPIO33
  Top 0.254: U3.18 93.77,26.72 JP5.3
GPIO34
  Top 0.254: U4.1 116.89,55.83 JP7.20
GPIO35
  Top 0.254: U4.2 117.11,54.63 JP7.19
GPIO36
  Top 0.254: U4.4 117.89,52.23 117.6,51.94 117.6,50.04 JP7.17
GPIO37
  Top 0.254: U4.5 118.47,51.03 118.11,50.67 118.11,48.01 JP7.16
GPIO38
  Top 0.254: U4.6 119.04,49.83 118.62,49.4 118.62,45.97 JP7.15
GPIO39
  Top 0.254: U4.7 119.62,48.63 119.13,48.13 119.13,43.94 JP7.14
GPIO40
  Top 0.254: U4.8 120.07,47.43 119.63,46.99 119.63,41.91 JP7.13
GPIO41
  Top 0.254: U4.9 120.65,46.23 120.14,45.72 120.14,39.88 JP7.12
GPIO42
  Top 0.254: U4.10 121.23,45.03 120.65,44.45 120.65,37.85 JP7.11
GPIO43
  Top 0.254: U4.17 128.64,35.19 129.03,34.8 129.03,28.45 JP7.4
GPIO44
  Top 0.254: U4.18 129.84,26.72 JP7.3
GPIO45
  Top 0.254: U5.1 8.69,111.71 JP9.20
GPIO46
  Top 0.254: U5.2 8.91,110.51 JP9.19
GPIO47
  Top 0.254: U5.4 9.68,108.11 9.4,107.82 9.4,105.92 JP9.17
GPIO48
  Top 0.254: U5.5 10.26,106.91 9.91,106.55 9.91,103.89 JP9.16
GPIO49
  Top 0.254: U5.6 10.84,105.71 10.41,105.28 10.41,101.85 JP9.15
GPIO50
  Top 0.254: U5.7 11.42,104.51 10.92,104.01 10.92,99.82 JP9.14
GPIO51
  Top 0.254: U5.8 11.87,103.31 11.43,102.87 11.43,97.79 JP9.13
GPIO52
  Top 0.254: U5.9 12.45,102.11 11.94,101.6 11.94,95.76 JP9.12
GPIO53
  Top 0.254: U5.10 13.02,100.91 12.45,100.33 12.45,93.73 JP9.11
GPIO54
  Top 0.254: U5.17 20.44,91.07 20.83,90.68 20.83,84.33 JP9.4
GPIO55
  Top 0.254: U5.18 21.64,82.6 JP9.3
GPIO56
  Top 0.254: U6.1 44.76,111.71 JP11.20
GPIO57
  Top 0.254: U6.2 44.98,110.51 JP11.19
GPIO58
  Top 0.254: U6.4 45.75,108.11 45.47,107.82 45.47,105.92 JP11.17
GPIO59
  Top 0.254: U6.5 46.33,106.91 45.97,106.55 45.97,103.89 JP11.16
GPIO60
  Top 0.254: U6.6 46.91,105.71 46.48,105.28 46.48,101.85 JP11.15
GPIO61
  Top 0.254: U6.7 47.48,104.51 46.99,104.01 46.99,99.82 JP11.14
GPIO62
  Top 0.254: U6.8 47.94,103.31 47.5,102.87 47.5,97.79 JP11.13
GPIO63
  Top 0.254: U6.9 48.51,102.11 48.01,101.6 48.01,95.76 JP11.12
GPIO64
  Top 0.254: U6.10 49.09,100.91 48.51,100.33 48.51,93.73 JP11.11
GPIO65
  Top 0.254: U6.17 56.51,91.07 56.9,90.68 56.9,84.33 JP11.4
GPIO66
  Top 0.254: U6.18 57.71,82.6 JP11.3
GPIO67
  Top 0.254: U7.1 80.82,111.71 JP13.20
GPIO68
  Top 0.254: U7.2 81.04,110.51 JP13.19
GPIO69
  Top 0.254: U7.4 81.82,108.11 81.53,107.82 81.53,105.92 JP13.17
GPIO70
  Top 0.254: U7.5 82.4,106.91 82.04,106.55 82.04,103.89 JP13.16
GPIO71
  Top 0.254: U7.6 82.97,105.71 82.55,105.28 82.55,101.85 JP13.15
GPIO72
  Top 0.254: U7.7 83.55,104.51 83.06,104.01 83.06,99.82 JP13.14
GPIO73
  Top 0.254: U7.8 84,103.31 83.57,102.87 83.57,97.79 JP13.13
GPIO74
  Top 0.254: U7.9 84.58,102.11 84.07,101.6 84.07,95.76 JP13.12
GPIO75
  Top 0.254: U7.10 85.16,100.91 84.58,100.33 84.58,93.73 JP13.11
GPIO76
  Top 0.254: U7.17 92.57,91.07 92.96,90.68 92.96,84.33 JP13.4
GPIO77
  Top 0.254: U7.18 93.77,82.6 JP13.3
GPIO78
  Top 0.254: U8.1 116.89,111.71 JP15.20
GPIO79
  Top 0.254: U8.2 117.11,110.51 JP15.19
GPIO80
  Top 0.254: U8.4 117.89,108.11 117.6,107.82 117.6,105.92 JP15.17
GPIO81
  Top 0.254: U8.5 118.47,106.91 118.11,106.55 118.11,103.89 JP15.16
GPIO82
  Top 0.254: U8.6 119.04,105.71 118.62,105.28 118.62,101.85 JP15.15
GPIO83
  Top 0.254: U8.7 119.62,104.51 119.13,104.01 119.13,99.82 JP15.14
GPIO84
  Top 0.254: U8.8 120.07,103.31 119.63,102.87 119.63,97.79 JP15.13
GPIO85
  Top 0.254: U8.9 120.65,102.11 120.14,101.6 120.14,95.76 JP15.12
GPIO86
  Top 0.254: U8.10 121.23,100.91 120.65,100.33 120.65,93.73 JP15.11
GPIO87
  Top 0.254: U8.17 128.64,91.07 129.03,90.68 129.03,84.33 JP15.4
GPIO88
  Top 0.254: U8.18 129.84,82.6 JP15.3
LED0  (via drill 0.51)
  Top 0.254: U1.30 32.12,43.83 37.34,38.61 37.34,34.8 38.61,33.53 JP2.10 | D1.C 17.02,29.72 v18.29,28.45
  Bottom 0.254: v18.29,28.45 28.45,28.45 30.99,30.99 38.61,30.99 JP2.10
LED1  (via drill 0.51)
  Top 0.254: U1.29 32.17,42.63 36.45,38.35 36.45,33.15 38.61,30.99 JP2.11 | D2.C 32.26,29.72 v30.99,28.45
  Bottom 0.254: v30.99,28.45 38.61,28.45 JP2.11
LED2  (via drill 0.51)
  Top 0.254: U2.30 68.19,43.83 73.41,38.61 73.41,34.8 74.68,33.53 JP4.10 | D3.C 53.09,29.72 v54.36,28.45
  Bottom 0.254: v54.36,28.45 64.52,28.45 67.06,30.99 74.68,30.99 JP4.10
LED3  (via drill 0.51)
  Top 0.254: U2.29 68.24,42.63 72.52,38.35 72.52,33.15 74.68,30.99 JP4.11 | D4.C 68.33,29.72 v67.06,28.45
  Bottom 0.254: v67.06,28.45 74.68,28.45 JP4.11
LED4  (via drill 0.51)
  Top 0.254: U3.30 104.25,43.83 109.47,38.61 109.47,34.8 110.74,33.53 JP6.10 | D5.C 89.15,29.72 v90.42,28.45
  Bottom 0.254: v90.42,28.45 100.58,28.45 103.12,30.99 110.74,30.99 JP6.10
LED5  (via drill 0.51)
  Top 0.254: U3.29 104.31,42.63 108.58,38.35 108.58,33.15 110.74,30.99 JP6.11 | D6.C 104.39,29.72 v103.12,28.45
  Bottom 0.254: v103.12,28.45 110.74,28.45 JP6.11
LED6  (via drill 0.51)
  Top 0.254: U4.30 140.32,43.83 145.54,38.61 145.54,34.8 146.81,33.53 JP8.10 | D7.C 125.22,29.72 v126.49,28.45
  Bottom 0.254: v126.49,28.45 136.65,28.45 139.19,30.99 146.81,30.99 JP8.10
LED7  (via drill 0.51)
  Top 0.254: U4.29 140.38,42.63 144.65,38.35 144.65,33.15 146.81,30.99 JP8.11 | D8.C 140.46,29.72 v139.19,28.45
  Bottom 0.254: v139.19,28.45 146.81,28.45 JP8.11
LED8  (via drill 0.51)
  Top 0.254: U5.30 32.12,99.71 37.34,94.49 37.34,90.68 38.61,89.41 JP10.10 | D9.C 17.02,85.6 v18.29,84.33
  Bottom 0.254: v18.29,84.33 28.45,84.33 30.99,86.87 38.61,86.87 JP10.10
LED9  (via drill 0.51)
  Top 0.254: U5.29 32.17,98.51 36.45,94.23 36.45,89.03 38.61,86.87 JP10.11 | D10.C 32.26,85.6 v30.99,84.33
  Bottom 0.254: v30.99,84.33 38.61,84.33 JP10.11
LED10  (via drill 0.51)
  Top 0.254: U6.30 68.19,99.71 73.41,94.49 73.41,90.68 74.68,89.41 JP12.10 | D11.C 53.09,85.6 v54.36,84.33
  Bottom 0.254: v54.36,84.33 64.52,84.33 67.06,86.87 74.68,86.87 JP12.10
LED11  (via drill 0.51)
  Top 0.254: U6.29 68.24,98.51 72.52,94.23 72.52,89.03 74.68,86.87 JP12.11 | D12.C 68.33,85.6 v67.06,84.33
  Bottom 0.254: v67.06,84.33 74.68,84.33 JP12.11
LED12  (via drill 0.51)
  Top 0.254: U7.30 104.25,99.71 109.47,94.49 109.47,90.68 110.74,89.41 JP14.10 | D13.C 89.15,85.6 v90.42,84.33
  Bottom 0.254: v90.42,84.33 100.58,84.33 103.12,86.87 110.74,86.87 JP14.10
LED13  (via drill 0.51)
  Top 0.254: U7.29 104.31,98.51 108.58,94.23 108.58,89.03 110.74,86.87 JP14.11 | D14.C 104.39,85.6 v103.12,84.33
  Bottom 0.254: v103.12,84.33 110.74,84.33 JP14.11
LED14  (via drill 0.51)
  Top 0.254: U8.30 140.32,99.71 145.54,94.49 145.54,90.68 146.81,89.41 JP16.10 | D15.C 125.22,85.6 v126.49,84.33
  Bottom 0.254: v126.49,84.33 136.65,84.33 139.19,86.87 146.81,86.87 JP16.10
LED15  (via drill 0.51)
  Top 0.254: U8.29 140.38,98.51 144.65,94.23 144.65,89.03 146.81,86.87 JP16.11 | D16.C 140.46,85.6 v139.19,84.33
  Bottom 0.254: v139.19,84.33 146.81,84.33 JP16.11
MIC_BIAS
  Top 0.254: U1.31 33.46,45.03 38.61,39.88 38.61,37.34 39.88,36.07 JP2.9
MIC_BIAS1
  Top 0.254: U2.31 69.53,45.03 74.68,39.88 74.68,37.34 75.95,36.07 JP4.9
MIC_BIAS2
  Top 0.254: U3.31 105.59,45.03 110.74,39.88 110.74,37.34 112.01,36.07 JP6.9
MIC_BIAS3
  Top 0.254: U4.31 141.66,45.03 146.81,39.88 146.81,37.34 148.08,36.07 JP8.9
MIC_BIAS4
  Top 0.254: U5.31 33.46,100.91 38.61,95.76 38.61,93.22 39.88,91.95 JP10.9
MIC_BIAS5
  Top 0.254: U6.31 69.53,100.91 74.68,95.76 74.68,93.22 75.95,91.95 JP12.9
MIC_BIAS6
  Top 0.254: U7.31 105.59,100.91 110.74,95.76 110.74,93.22 112.01,91.95 JP14.9
MIC_BIAS7
  Top 0.254: U8.31 141.66,100.91 146.81,95.76 146.81,93.22 148.08,91.95 JP16.9
MIC_L+
  Top 0.254: U1.32 35.31,46.23 39.88,41.66 39.88,39.88 JP2.8
MIC_L+1
  Top 0.254: U2.32 71.37,46.23 75.95,41.66 75.95,39.88 JP4.8
MIC_L+2
  Top 0.254: U3.32 107.44,46.23 112.01,41.66 112.01,39.88 JP6.8
MIC_L+3
  Top 0.254: U4.32 143.51,46.23 148.08,41.66 148.08,39.88 JP8.8
MIC_L+4
  Top 0.254: U5.32 35.31,102.11 39.88,97.54 39.88,95.76 JP10.8
MIC_L+5
  Top 0.254: U6.32 71.37,102.11 75.95,97.54 75.95,95.76 JP12.8
MIC_L+6
  Top 0.254: U7.32 107.44,102.11 112.01,97.54 112.01,95.76 JP14.8
MIC_L+7
  Top 0.254: U8.32 143.51,102.11 148.08,97.54 148.08,95.76 JP16.8
MIC_L-
  Top 0.254: U1.34 36.84,48.63 40.51,44.96 40.51,44.32 JP2.6
MIC_L-1
  Top 0.254: U2.34 72.91,48.63 76.58,44.96 76.58,44.32 JP4.6
MIC_L-2
  Top 0.254: U3.34 108.98,48.63 112.65,44.96 112.65,44.32 JP6.6
MIC_L-3
  Top 0.254: U4.34 145.05,48.63 148.72,44.96 148.72,44.32 JP8.6
MIC_L-4
  Top 0.254: U5.34 36.84,104.51 40.51,100.84 40.51,100.2 JP10.6
MIC_L-5
  Top 0.254: U6.34 72.91,104.51 76.58,100.84 76.58,100.2 JP12.6
MIC_L-6
  Top 0.254: U7.34 108.98,104.51 112.65,100.84 112.65,100.2 JP14.6
MIC_L-7
  Top 0.254: U8.34 145.05,104.51 148.72,100.84 148.72,100.2 JP16.6
MIC_R+
  Top 0.254: U1.33 36.65,47.43 39.88,44.2 39.88,42.42 JP2.7
MIC_R+1
  Top 0.254: U2.33 72.71,47.43 75.95,44.2 75.95,42.42 JP4.7
MIC_R+2
  Top 0.254: U3.33 108.78,47.43 112.01,44.2 112.01,42.42 JP6.7
MIC_R+3
  Top 0.254: U4.33 144.85,47.43 148.08,44.2 148.08,42.42 JP8.7
MIC_R+4
  Top 0.254: U5.33 36.65,103.31 39.88,100.08 39.88,98.3 JP10.7
MIC_R+5
  Top 0.254: U6.33 72.71,103.31 75.95,100.08 75.95,98.3 JP12.7
MIC_R+6
  Top 0.254: U7.33 108.78,103.31 112.01,100.08 112.01,98.3 JP14.7
MIC_R+7
  Top 0.254: U8.33 144.85,103.31 148.08,100.08 148.08,98.3 JP16.7
MIC_R-
  Top 0.254: U1.35 31.2,49.83 30.99,50.04 37.97,50.04 40.51,47.5 40.51,46.86 JP2.5
MIC_R-1
  Top 0.254: U2.35 67.27,49.83 67.06,50.04 74.04,50.04 76.58,47.5 76.58,46.86 JP4.5
MIC_R-2
  Top 0.254: U3.35 103.33,49.83 103.12,50.04 110.11,50.04 112.65,47.5 112.65,46.86 JP6.5
MIC_R-3
  Top 0.254: U4.35 139.4,49.83 139.19,50.04 146.18,50.04 148.72,47.5 148.72,46.86 JP8.5
MIC_R-4
  Top 0.254: U5.35 31.2,105.71 30.99,105.92 37.97,105.92 40.51,103.38 40.51,102.74 JP10.5
MIC_R-5
  Top 0.254: U6.35 67.27,105.71 67.06,105.92 74.04,105.92 76.58,103.38 76.58,102.74 JP12.5
MIC_R-6
  Top 0.254: U7.35 103.33,105.71 103.12,105.92 110.11,105.92 112.65,103.38 112.65,102.74 JP14.5
MIC_R-7
  Top 0.254: U8.35 139.4,105.71 139.19,105.92 146.18,105.92 148.72,103.38 148.72,102.74 JP16.5
N$1
  Top 0.254: D2.A 31.74,31.74 30.14,30.14 R2.1
N$2
  Top 0.254: D1.A 17.54,31.74 19.14,30.14 R1.1
N$3
  Top 0.254: D4.A 67.81,31.74 66.21,30.14 R4.1
N$4
  Top 0.254: D3.A 53.61,31.74 55.21,30.14 R3.1
N$5
  Top 0.254: D6.A 103.87,31.74 102.27,30.14 R6.1
N$6
  Top 0.254: D5.A 89.67,31.74 91.27,30.14 R5.1
N$7
  Top 0.254: D8.A 139.94,31.74 138.34,30.14 R8.1
N$8
  Top 0.254: D7.A 125.74,31.74 127.34,30.14 R7.1
N$9
  Top 0.254: D10.A 31.74,87.62 30.14,86.02 R10.1
N$10
  Top 0.254: D9.A 17.54,87.62 19.14,86.02 R9.1
N$11
  Top 0.254: D12.A 67.81,87.62 66.21,86.02 R12.1
N$12
  Top 0.254: D11.A 53.61,87.62 55.21,86.02 R11.1
N$13
  Top 0.254: D14.A 103.87,87.62 102.27,86.02 R14.1
N$14
  Top 0.254: D13.A 89.67,87.62 91.27,86.02 R13.1
N$15
  Top 0.254: D16.A 139.94,87.62 138.34,86.02 R16.1
N$16
  Top 0.254: D15.A 125.74,87.62 127.34,86.02 R15.1
PCM_CLK
  Top 0.254: JP2.16 38.61,18.29 28.45,28.45 28.45,34.8 28.84,35.19 U1.24
PCM_CLK1
  Top 0.254: JP4.16 74.68,18.29 64.52,28.45 64.52,34.8 64.91,35.19 U2.24
PCM_CLK2
  Top 0.254: JP6.16 110.74,18.29 100.58,28.45 100.58,34.8 100.97,35.19 U3.24
PCM_CLK3
  Top 0.254: JP8.16 146.81,18.29 136.65,28.45 136.65,34.8 137.04,35.19 U4.24
PCM_CLK4
  Top 0.254: JP10.16 38.61,74.17 28.45,84.33 28.45,90.68 28.84,91.07 U5.24
PCM_CLK5
  Top 0.254: JP12.16 74.68,74.17 64.52,84.33 64.52,90.68 64.91,91.07 U6.24
PCM_CLK6
  Top 0.254: JP14.16 110.74,74.17 100.58,84.33 100.58,90.68 100.97,91.07 U7.24
PCM_CLK7
  Top 0.254: JP16.16 146.81,74.17 136.65,84.33 136.65,90.68 137.04,91.07 U8.24
PCM_IN
  Top 0.254: U1.21 25.24,24.04 38.61,10.67 JP2.19
PCM_IN1
  Top 0.254: U2.21 61.31,24.04 74.68,10.67 JP4.19
PCM_IN2
  Top 0.254: U3.21 97.37,24.04 110.74,10.67 JP6.19
PCM_IN3
  Top 0.254: U4.21 133.44,24.04 146.81,10.67 JP8.19
PCM_IN4
  Top 0.254: U5.21 25.24,79.92 38.61,66.55 JP10.19
PCM_IN5
  Top 0.254: U6.21 61.31,79.92 74.68,66.55 JP12.19
PCM_IN6
  Top 0.254: U7.21 97.37,79.92 110.74,66.55 JP14.19
PCM_IN7
  Top 0.254: U8.21 133.44,79.92 146.81,66.55 JP16.19
PCM_OUT
  Top 0.254: U1.22 26.44,25.38 38.61,13.21 JP2.18
PCM_OUT1
  Top 0.254: U2.22 62.51,25.38 74.68,13.21 JP4.18
PCM_OUT2
  Top 0.254: U3.22 98.57,25.38 110.74,13.21 JP6.18
PCM_OUT3
  Top 0.254: U4.22 134.64,25.38 146.81,13.21 JP8.18
PCM_OUT4
  Top 0.254: U5.22 26.44,81.26 38.61,69.09 JP10.18
PCM_OUT5
  Top 0.254: U6.22 62.51,81.26 74.68,69.09 JP12.18
PCM_OUT6
  Top 0.254: U7.22 98.57,81.26 110.74,69.09 JP14.18
PCM_OUT7
  Top 0.254: U8.22 134.64,81.26 146.81,69.09 JP16.18
PCM_SYNC
  Top 0.254: U1.23 27.64,26.72 38.61,15.75 JP2.17
PCM_SYNC1
  Top 0.254: U2.23 63.71,26.72 74.68,15.75 JP4.17
PCM_SYNC2
  Top 0.254: U3.23 99.77,26.72 110.74,15.75 JP6.17
PCM_SYNC3
  Top 0.254: U4.23 135.84,26.72 146.81,15.75 JP8.17
PCM_SYNC4
  Top 0.254: U5.23 27.64,82.6 38.61,71.63 JP10.17
PCM_SYNC5
  Top 0.254: U6.23 63.71,82.6 74.68,71.63 JP12.17
PCM_SYNC6
  Top 0.254: U7.23 99.77,82.6 110.74,71.63 JP14.17
PCM_SYNC7
  Top 0.254: U8.23 135.84,82.6 146.81,71.63 JP16.17
PWREN
  Top 0.254: U1.19 22.84,25.38 JP1.2
PWREN1
  Top 0.254: U2.19 58.91,25.38 JP3.2
PWREN2
  Top 0.254: U3.19 94.97,25.38 JP5.2
PWREN3
  Top 0.254: U4.19 131.04,25.38 JP7.2
PWREN4
  Top 0.254: U5.19 22.84,81.26 JP9.2
PWREN5
  Top 0.254: U6.19 58.91,81.26 JP11.2
PWREN6
  Top 0.254: U7.19 94.97,81.26 JP13.2
PWREN7
  Top 0.254: U8.19 131.04,81.26 JP15.2
SPI_CLK
  Top 0.254: U1.27 32.42,40.23 35.05,37.59 35.05,30.73 39.88,25.91 JP2.13
SPI_CLK1
  Top 0.254: U2.27 68.48,40.23 71.12,37.59 71.12,30.73 75.95,25.91 JP4.13
SPI_CLK2
  Top 0.254: U3.27 104.55,40.23 107.19,37.59 107.19,30.73 112.01,25.91 JP6.13
SPI_CLK3
  Top 0.254: U4.27 140.62,40.23 143.26,37.59 143.26,30.73 148.08,25.91 JP8.13
SPI_CLK4
  Top 0.254: U5.27 32.42,96.11 35.05,93.47 35.05,86.61 39.88,81.79 JP10.13
SPI_CLK5
  Top 0.254: U6.27 68.48,96.11 71.12,93.47 71.12,86.61 75.95,81.79 JP12.13
SPI_CLK6
  Top 0.254: U7.27 104.55,96.11 107.19,93.47 107.19,86.61 112.01,81.79 JP14.13
SPI_CLK7
  Top 0.254: U8.27 140.62,96.11 143.26,93.47 143.26,86.61 148.08,81.79 JP16.13
SPI_MISO
  Top 0.254: U1.26 32.73,39.03 34.29,37.47 34.29,28.96 39.88,23.37 JP2.14
SPI_MISO1
  Top 0.254: U2.26 68.8,39.03 70.36,37.47 70.36,28.96 75.95,23.37 JP4.14
SPI_MISO2
  Top 0.254: U3.26 104.86,39.03 106.43,37.47 106.43,28.96 112.01,23.37 JP6.14
SPI_MISO3
  Top 0.254: U4.26 140.93,39.03 142.49,37.47 142.49,28.96 148.08,23.37 JP8.14
SPI_MISO4
  Top 0.254: U5.26 32.73,94.91 34.29,93.34 34.29,84.84 39.88,79.25 JP10.14
SPI_MISO5
  Top 0.254: U6.26 68.8,94.91 70.36,93.34 70.36,84.84 75.95,79.25 JP12.14
SPI_MISO6
  Top 0.254: U7.26 104.86,94.91 106.43,93.34 106.43,84.84 112.01,79.25 JP14.14
SPI_MISO7
  Top 0.254: U8.26 140.93,94.91 142.49,93.34 142.49,84.84 148.08,79.25 JP16.14
SPI_MOSI
  Top 0.254: U1.28 32.23,41.43 35.69,37.97 35.69,31.37 38.61,28.45 JP2.12
SPI_MOSI1
  Top 0.254: U2.28 68.3,41.43 71.75,37.97 71.75,31.37 74.68,28.45 JP4.12
SPI_MOSI2
  Top 0.254: U3.28 104.37,41.43 107.82,37.97 107.82,31.37 110.74,28.45 JP6.12
SPI_MOSI3
  Top 0.254: U4.28 140.44,41.43 143.89,37.97 143.89,31.37 146.81,28.45 JP8.12
SPI_MOSI4
  Top 0.254: U5.28 32.23,97.31 35.69,93.85 35.69,87.25 38.61,84.33 JP10.12
SPI_MOSI5
  Top 0.254: U6.28 68.3,97.31 71.75,93.85 71.75,87.25 74.68,84.33 JP12.12
SPI_MOSI6
  Top 0.254: U7.28 104.37,97.31 107.82,93.85 107.82,87.25 110.74,84.33 JP14.12
SPI_MOSI7
  Top 0.254: U8.28 140.44,97.31 143.89,93.85 143.89,87.25 146.81,84.33 JP16.12
SPI_SS
  Top 0.254: U1.25 33.04,37.83 33.53,37.34 33.53,27.18 39.88,20.83 JP2.15
SPI_SS1
  Top 0.254: U2.25 69.11,37.83 69.6,37.34 69.6,27.18 75.95,20.83 JP4.15
SPI_SS2
  Top 0.254: U3.25 105.17,37.83 105.66,37.34 105.66,27.18 112.01,20.83 JP6.15
SPI_SS3
  Top 0.254: U4.25 141.24,37.83 141.73,37.34 141.73,27.18 148.08,20.83 JP8.15
SPI_SS4
  Top 0.254: U5.25 33.04,93.71 33.53,93.22 33.53,83.06 39.88,76.71 JP10.15
SPI_SS5
  Top 0.254: U6.25 69.11,93.71 69.6,93.22 69.6,83.06 75.95,76.71 JP12.15
SPI_SS6
  Top 0.254: U7.25 105.17,93.71 105.66,93.22 105.66,83.06 112.01,76.71 JP14.15
SPI_SS7
  Top 0.254: U8.25 141.24,93.71 141.73,93.22 141.73,83.06 148.08,76.71 JP16.15
SPKR_L+
  Top 0.254: U1.40 40.59,55.83 JP2.1
SPKR_L+1
  Top 0.254: U2.40 76.66,55.83 JP4.1
SPKR_L+2
  Top 0.254: U3.40 112.72,55.83 JP6.1
SPKR_L+3
  Top 0.254: U4.40 148.79,55.83 JP8.1
SPKR_L+4
  Top 0.254: U5.40 40.59,111.71 JP10.1
SPKR_L+5
  Top 0.254: U6.40 76.66,111.71 JP12.1
SPKR_L+6
  Top 0.254: U7.40 112.72,111.71 JP14.1
SPKR_L+7
  Top 0.254: U8.40 148.79,111.71 JP16.1
SPKR_L-
  Top 0.254: U1.38 39.66,53.43 41.15,51.94 JP2.3
SPKR_L-1
  Top 0.254: U2.38 75.73,53.43 77.22,51.94 JP4.3
SPKR_L-2
  Top 0.254: U3.38 111.8,53.43 113.28,51.94 JP6.3
SPKR_L-3
  Top 0.254: U4.38 147.87,53.43 149.35,51.94 JP8.3
SPKR_L-4
  Top 0.254: U5.38 39.66,109.31 41.15,107.82 JP10.3
SPKR_L-5
  Top 0.254: U6.38 75.73,109.31 77.22,107.82 JP12.3
SPKR_L-6
  Top 0.254: U7.38 111.8,109.31 113.28,107.82 JP14.3
SPKR_L-7
  Top 0.254: U8.38 147.87,109.31 149.35,107.82 JP16.3
SPKR_R+
  Top 0.254: U1.39 40.37,54.63 JP2.2
SPKR_R+1
  Top 0.254: U2.39 76.44,54.63 JP4.2
SPKR_R+2
  Top 0.254: U3.39 112.5,54.63 JP6.2
SPKR_R+3
  Top 0.254: U4.39 148.57,54.63 JP8.2
SPKR_R+4
  Top 0.254: U5.39 40.37,110.51 JP10.2
SPKR_R+5
  Top 0.254: U6.39 76.44,110.51 JP12.2
SPKR_R+6
  Top 0.254: U7.39 112.5,110.51 JP14.2
SPKR_R+7
  Top 0.254: U8.39 148.57,110.51 JP16.2
SPKR_R-
  Top 0.254: U1.37 38.96,52.23 39.88,51.31 39.88,50.04 JP2.4
SPKR_R-1
  Top 0.254: U2.37 75.03,52.23 75.95,51.31 75.95,50.04 JP4.4
SPKR_R-2
  Top 0.254: U3.37 111.09,52.23 112.01,51.31 112.01,50.04 JP6.4
SPKR_R-3
  Top 0.254: U4.37 147.16,52.23 148.08,51.31 148.08,50.04 JP8.4
SPKR_R-4
  Top 0.254: U5.37 38.96,108.11 39.88,107.19 39.88,105.92 JP10.4
SPKR_R-5
  Top 0.254: U6.37 75.03,108.11 75.95,107.19 75.95,105.92 JP12.4
SPKR_R-6
  Top 0.254: U7.37 111.09,108.11 112.01,107.19 112.01,105.92 JP14.4
SPKR_R-7
  Top 0.254: U8.37 147.16,108.11 148.08,107.19 148.08,105.92 JP16.4
UART_CTS
  Top 0.254: U1.14 15.34,40.23 14.48,39.37 14.48,29.72 JP1.7
UART_CTS1
  Top 0.254: U2.14 51.4,40.23 50.55,39.37 50.55,29.72 JP3.7
UART_CTS2
  Top 0.254: U3.14 87.47,40.23 86.61,39.37 86.61,29.72 JP5.7
UART_CTS3
  Top 0.254: U4.14 123.54,40.23 122.68,39.37 122.68,29.72 JP7.7
UART_CTS4
  Top 0.254: U5.14 15.34,96.11 14.48,95.25 14.48,85.6 JP9.7
UART_CTS5
  Top 0.254: U6.14 51.4,96.11 50.55,95.25 50.55,85.6 JP11.7
UART_CTS6
  Top 0.254: U7.14 87.47,96.11 86.61,95.25 86.61,85.6 JP13.7
UART_CTS7
  Top 0.254: U8.14 123.54,96.11 122.68,95.25 122.68,85.6 JP15.7
UART_RTS
  Top 0.254: U1.13 15.52,41.43 13.97,39.88 13.97,31.75 JP1.8
UART_RTS1
  Top 0.254: U2.13 51.59,41.43 50.04,39.88 50.04,31.75 JP3.8
UART_RTS2
  Top 0.254: U3.13 87.66,41.43 86.11,39.88 86.11,31.75 JP5.8
UART_RTS3
  Top 0.254: U4.13 123.72,41.43 122.17,39.88 122.17,31.75 JP7.8
UART_RTS4
  Top 0.254: U5.13 15.52,97.31 13.97,95.76 13.97,87.63 JP9.8
UART_RTS5
  Top 0.254: U6.13 51.59,97.31 50.04,95.76 50.04,87.63 JP11.8
UART_RTS6
  Top 0.254: U7.13 87.66,97.31 86.11,95.76 86.11,87.63 JP13.8
UART_RTS7
  Top 0.254: U8.13 123.72,97.31 122.17,95.76 122.17,87.63 JP15.8
UART_RX
  Top 0.254: U1.16 16.24,37.83 15.75,37.34 15.75,25.91 JP1.5
UART_RX1
  Top 0.254: U2.16 52.31,37.83 51.82,37.34 51.82,25.91 JP3.5
UART_RX2
  Top 0.254: U3.16 88.37,37.83 87.88,37.34 87.88,25.91 JP5.5
UART_RX3
  Top 0.254: U4.16 124.44,37.83 123.95,37.34 123.95,25.91 JP7.5
UART_RX4
  Top 0.254: U5.16 16.24,93.71 15.75,93.22 15.75,81.79 JP9.5
UART_RX5
  Top 0.254: U6.16 52.31,93.71 51.82,93.22 51.82,81.79 JP11.5
UART_RX6
  Top 0.254: U7.16 88.37,93.71 87.88,93.22 87.88,81.79 JP13.5
UART_RX7
  Top 0.254: U8.16 124.44,93.71 123.95,93.22 123.95,81.79 JP15.5
UART_TX
  Top 0.254: U1.15 15.53,39.03 14.99,38.48 14.99,27.69 JP1.6
UART_TX1
  Top 0.254: U2.15 51.6,39.03 51.05,38.48 51.05,27.69 JP3.6
UART_TX2
  Top 0.254: U3.15 87.67,39.03 87.12,38.48 87.12,27.69 JP5.6
UART_TX3
  Top 0.254: U4.15 123.74,39.03 123.19,38.48 123.19,27.69 JP7.6
UART_TX4
  Top 0.254: U5.15 15.53,94.91 14.99,94.36 14.99,83.57 JP9.6
UART_TX5
  Top 0.254: U6.15 51.6,94.91 51.05,94.36 51.05,83.57 JP11.6
UART_TX6
  Top 0.254: U7.15 87.67,94.91 87.12,94.36 87.12,83.57 JP13.6
UART_TX7
  Top 0.254: U8.15 123.74,94.91 123.19,94.36 123.19,83.57 JP15.6
USBD+
  Top 0.254: U1.12 13.93,42.63 13.46,42.16 13.46,33.78 JP1.9
USBD+1
  Top 0.254: U2.12 49.99,42.63 49.53,42.16 49.53,33.78 JP3.9
USBD+2
  Top 0.254: U3.12 86.06,42.63 85.6,42.16 85.6,33.78 JP5.9
USBD+3
  Top 0.254: U4.12 122.13,42.63 121.67,42.16 121.67,33.78 JP7.9
USBD+4
  Top 0.254: U5.12 13.93,98.51 13.46,98.04 13.46,89.66 JP9.9
USBD+5
  Top 0.254: U6.12 49.99,98.51 49.53,98.04 49.53,89.66 JP11.9
USBD+6
  Top 0.254: U7.12 86.06,98.51 85.6,98.04 85.6,89.66 JP13.9
USBD+7
  Top 0.254: U8.12 122.13,98.51 121.67,98.04 121.67,89.66 JP15.9
USBD-
  Top 0.254: U1.11 13.6,43.83 12.95,43.18 12.95,35.81 JP1.10
USBD-1
  Top 0.254: U2.11 49.67,43.83 49.02,43.18 49.02,35.81 JP3.10
USBD-2
  Top 0.254: U3.11 85.74,43.83 85.09,43.18 85.09,35.81 JP5.10
USBD-3
  Top 0.254: U4.11 121.81,43.83 121.16,43.18 121.16,35.81 JP7.10
USBD-4
  Top 0.254: U5.11 13.6,99.71 12.95,99.06 12.95,91.69 JP9.10
USBD-5
  Top 0.254: U6.11 49.67,99.71 49.02,99.06 49.02,91.69 JP11.10
USBD-6
  Top 0.254: U7.11 85.74,99.71 85.09,99.06 85.09,91.69 JP13.10
USBD-7
  Top 0.254: U8.11 121.81,99.71 121.16,99.06 121.16,91.69 JP15.10